# Altium PCB PCB_TestBoard.PcbDoc (part 2 of 2)
Units mil, origin at the board's own origin, x right, y up, seen from the top; angles counter-clockwise.
Board outline 3740.16 x 3346.46 mil, 2 copper layers (Top Layer, Bottom Layer); 100 components, 97 nets, 452 pads, 102 vias.
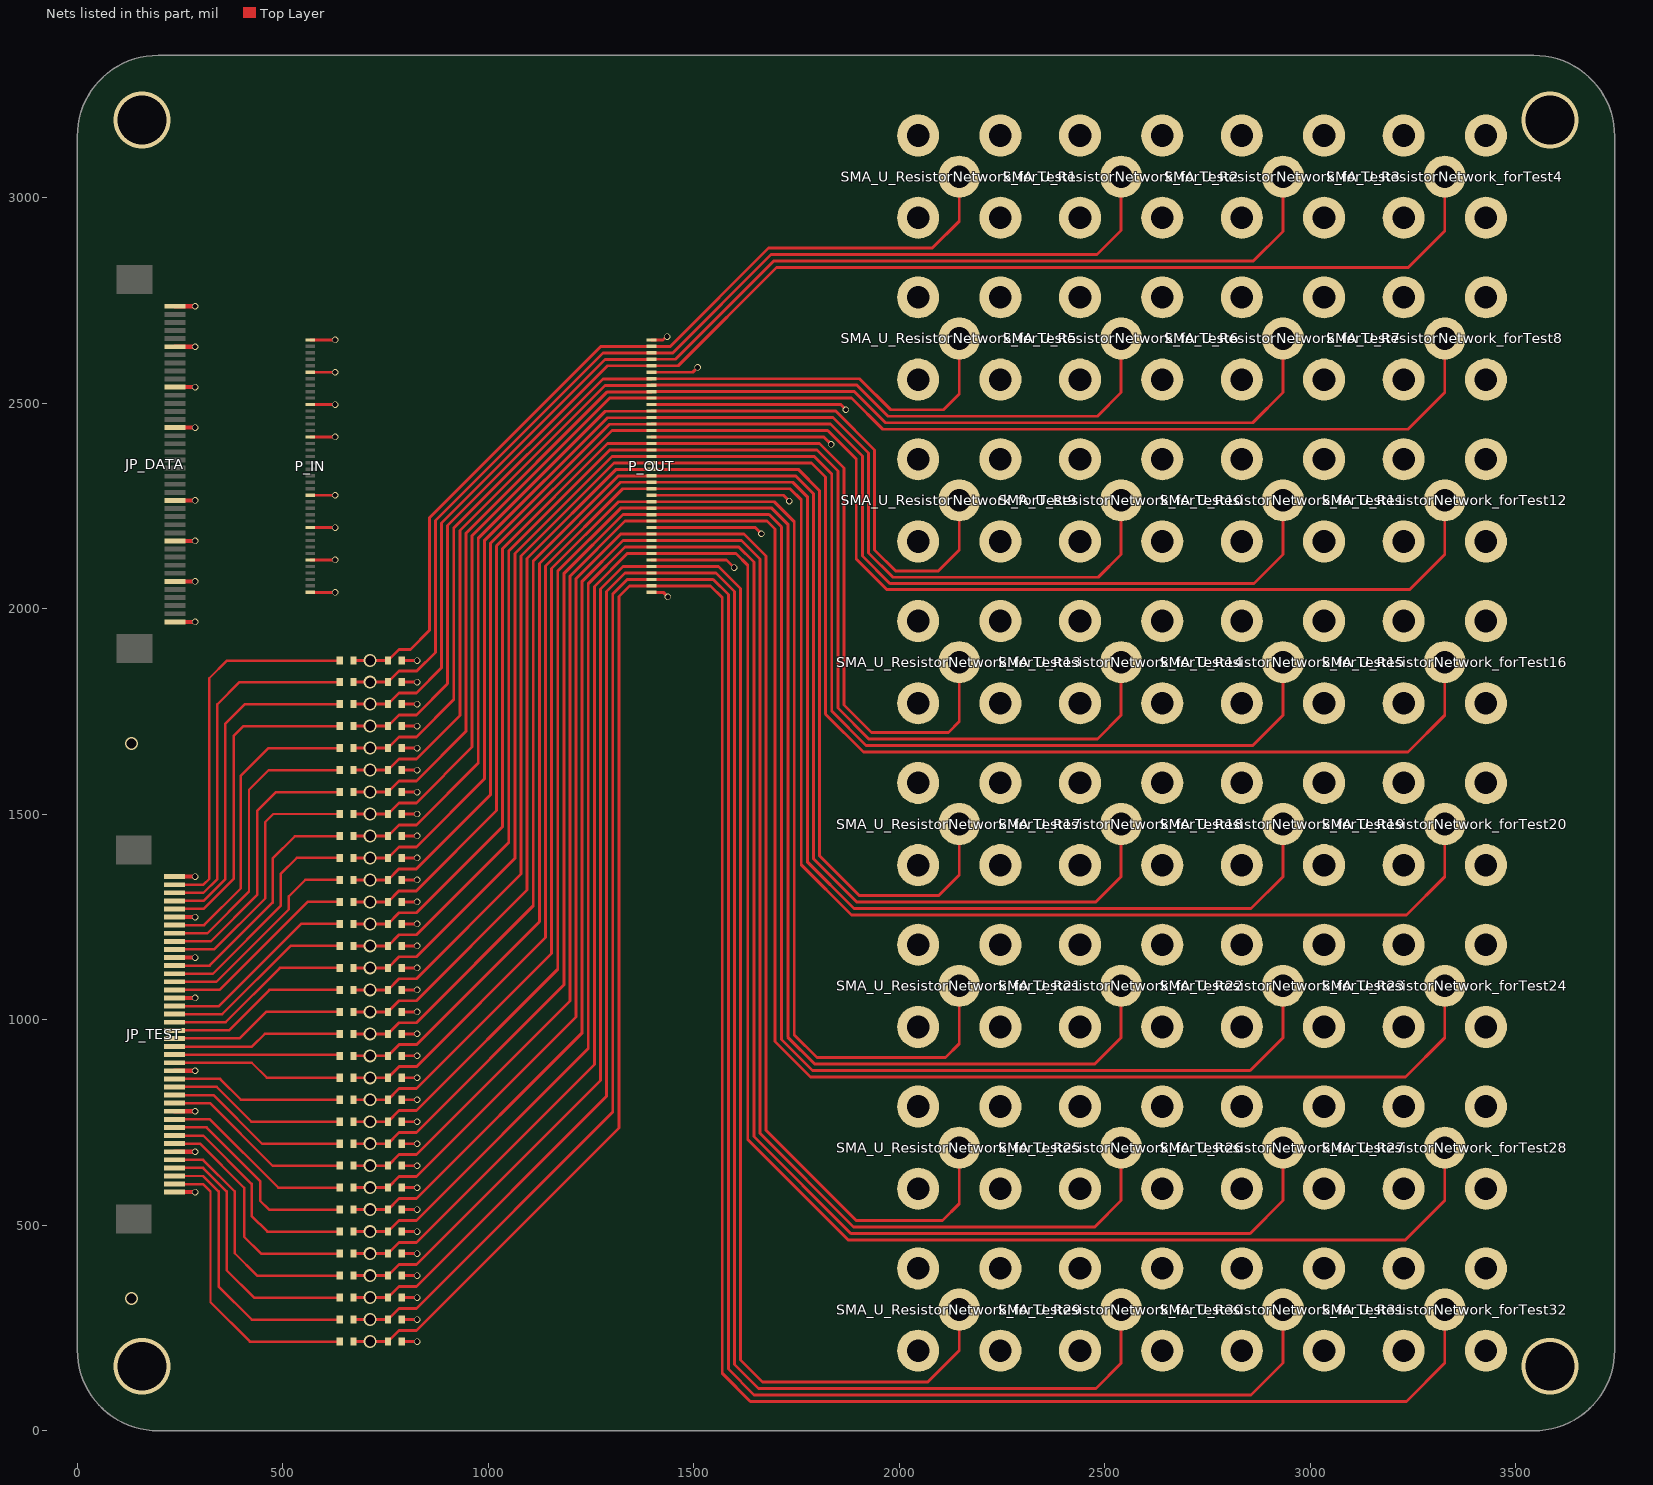
[diagram p2: the nets of this part, all layers, seen from the top]

## Via types
v1: diameter 15.75, hole 11.81, Top Layer to Bottom Layer, tented both sides, 64 vias
v2: diameter 31.5, hole 23.62, Top Layer to Bottom Layer, 34 vias
v3: diameter 137.8, hole 118.11, Top Layer to Bottom Layer, 4 vias

## Nets (pads, with @x,y where several pads share a name; then routed paths per layer and width w, separated by ;. In a path a pad name is that pad's centre, name@x,y a point inside that pad or via, vN(x,y) a via of type N, cw(c..) or ccw(c..) an arc to the next point about the centre after c; other vN are vias at no path point) (continued)
GND: JP_DATA.1 JP_DATA.6 JP_DATA.11 JP_DATA.16 JP_DATA.25 JP_DATA.30 JP_DATA.35 JP_DATA.40 JP_TEST.1 JP_TEST.6 JP_TEST.11 JP_TEST.16 JP_TEST.25 JP_TEST.30 JP_TEST.35 JP_TEST.40 P_IN.1 P_IN.6 P_IN.11 P_IN.16 P_IN.25 P_IN.30 P_IN.35 P_IN.40 P_OUT.1 P_OUT.6 P_OUT.11 P_OUT.16 P_OUT.25 P_OUT.30 P_OUT.35 P_OUT.40 RL_U_ResistorNetwork_forTest1.1 RL_U_ResistorNetwork_forTest2.1 RL_U_ResistorNetwork_forTest3.1 RL_U_ResistorNetwork_forTest4.1 RL_U_ResistorNetwork_forTest5.1 RL_U_ResistorNetwork_forTest6.1 RL_U_ResistorNetwork_forTest7.1 RL_U_ResistorNetwork_forTest8.1 RL_U_ResistorNetwork_forTest9.1 RL_U_ResistorNetwork_forTest10.1 RL_U_ResistorNetwork_forTest11.1 RL_U_ResistorNetwork_forTest12.1 RL_U_ResistorNetwork_forTest13.1 RL_U_ResistorNetwork_forTest14.1 RL_U_ResistorNetwork_forTest15.1 RL_U_ResistorNetwork_forTest16.1 RL_U_ResistorNetwork_forTest17.1 RL_U_ResistorNetwork_forTest18.1 RL_U_ResistorNetwork_forTest19.1 RL_U_ResistorNetwork_forTest20.1 RL_U_ResistorNetwork_forTest21.1 RL_U_ResistorNetwork_forTest22.1 RL_U_ResistorNetwork_forTest23.1 RL_U_ResistorNetwork_forTest24.1 RL_U_ResistorNetwork_forTest25.1 RL_U_ResistorNetwork_forTest26.1 RL_U_ResistorNetwork_forTest27.1 RL_U_ResistorNetwork_forTest28.1 RL_U_ResistorNetwork_forTest29.1 RL_U_ResistorNetwork_forTest30.1 RL_U_ResistorNetwork_forTest31.1 RL_U_ResistorNetwork_forTest32.1 SMA_U_ResistorNetwork_forTest1.2 SMA_U_ResistorNetwork_forTest1.3 SMA_U_ResistorNetwork_forTest2.2 SMA_U_ResistorNetwork_forTest2.3 SMA_U_ResistorNetwork_forTest3.2 SMA_U_ResistorNetwork_forTest3.3 SMA_U_ResistorNetwork_forTest4.2 SMA_U_ResistorNetwork_forTest4.3 SMA_U_ResistorNetwork_forTest5.2 SMA_U_ResistorNetwork_forTest5.3 SMA_U_ResistorNetwork_forTest6.2 SMA_U_ResistorNetwork_forTest6.3 SMA_U_ResistorNetwork_forTest7.2 SMA_U_ResistorNetwork_forTest7.3 SMA_U_ResistorNetwork_forTest8.2 SMA_U_ResistorNetwork_forTest8.3 SMA_U_ResistorNetwork_forTest9.2 SMA_U_ResistorNetwork_forTest9.3 SMA_U_ResistorNetwork_forTest10.2 SMA_U_ResistorNetwork_forTest10.3 SMA_U_ResistorNetwork_forTest11.2 SMA_U_ResistorNetwork_forTest11.3 SMA_U_ResistorNetwork_forTest12.2 SMA_U_ResistorNetwork_forTest12.3 SMA_U_ResistorNetwork_forTest13.2 SMA_U_ResistorNetwork_forTest13.3 SMA_U_ResistorNetwork_forTest14.2 SMA_U_ResistorNetwork_forTest14.3 SMA_U_ResistorNetwork_forTest15.2 SMA_U_ResistorNetwork_forTest15.3 SMA_U_ResistorNetwork_forTest16.2 SMA_U_ResistorNetwork_forTest16.3 SMA_U_ResistorNetwork_forTest17.2 SMA_U_ResistorNetwork_forTest17.3 SMA_U_ResistorNetwork_forTest18.2 SMA_U_ResistorNetwork_forTest18.3 SMA_U_ResistorNetwork_forTest19.2 SMA_U_ResistorNetwork_forTest19.3 SMA_U_ResistorNetwork_forTest20.2 SMA_U_ResistorNetwork_forTest20.3 SMA_U_ResistorNetwork_forTest21.2 SMA_U_ResistorNetwork_forTest21.3 SMA_U_ResistorNetwork_forTest22.2 SMA_U_ResistorNetwork_forTest22.3 SMA_U_ResistorNetwork_forTest23.2 SMA_U_ResistorNetwork_forTest23.3 SMA_U_ResistorNetwork_forTest24.2 SMA_U_ResistorNetwork_forTest24.3 SMA_U_ResistorNetwork_forTest25.2 SMA_U_ResistorNetwork_forTest25.3 SMA_U_ResistorNetwork_forTest26.2 SMA_U_ResistorNetwork_forTest26.3 SMA_U_ResistorNetwork_forTest27.2 SMA_U_ResistorNetwork_forTest27.3 SMA_U_ResistorNetwork_forTest28.2 SMA_U_ResistorNetwork_forTest28.3 SMA_U_ResistorNetwork_forTest29.2 SMA_U_ResistorNetwork_forTest29.3 SMA_U_ResistorNetwork_forTest30.2 SMA_U_ResistorNetwork_forTest30.3 SMA_U_ResistorNetwork_forTest31.2 SMA_U_ResistorNetwork_forTest31.3 SMA_U_ResistorNetwork_forTest32.2 SMA_U_ResistorNetwork_forTest32.3 | length 4418.3
  Top Layer w7: P_IN.40@567.09,2039.96 v1(627.09,2039.96) ; P_IN.35@567.09,2118.7 v1(627.09,2118.7) ; P_IN.30@567.09,2197.44 v1(627.09,2197.44) ; P_IN.25@567.09,2276.18 v1(627.09,2276.18) ; P_IN.16@567.09,2417.91 v1(627.09,2417.91) ; P_IN.11@567.09,2496.65 v1(627.09,2496.65) ; P_IN.6@567.09,2575.39 v1(627.09,2575.39) ; P_IN.1@567.09,2654.13 v1(627.09,2654.13) ; RL_U_ResistorNetwork_forTest32.1@789.37,217.32 v1(826.77,217.32) ; RL_U_ResistorNetwork_forTest31.1@789.37,270.79 v1(826.77,270.79) ; RL_U_ResistorNetwork_forTest30.1@789.37,324.27 v1(826.77,324.27) ; RL_U_ResistorNetwork_forTest29.1@789.37,377.74 v1(826.77,377.74) ; RL_U_ResistorNetwork_forTest28.1@789.37,431.21 v1(826.77,431.21) ; RL_U_ResistorNetwork_forTest27.1@789.37,484.69 v1(826.77,484.69) ; RL_U_ResistorNetwork_forTest26.1@789.37,538.16 v1(826.77,538.16) ; RL_U_ResistorNetwork_forTest25.1@789.37,591.63 v1(826.77,591.63) ; RL_U_ResistorNetwork_forTest24.1@789.37,645.11 v1(826.77,645.11) ; RL_U_ResistorNetwork_forTest23.1@789.37,698.58 v1(826.77,698.58) ; RL_U_ResistorNetwork_forTest22.1@789.37,752.06 v1(826.77,752.06) ; RL_U_ResistorNetwork_forTest21.1@789.37,805.53 v1(826.77,805.53) ; RL_U_ResistorNetwork_forTest20.1@789.37,859 v1(826.77,859) ; RL_U_ResistorNetwork_forTest19.1@789.37,912.48 v1(826.77,912.48) ; RL_U_ResistorNetwork_forTest18.1@789.37,965.95 v1(826.77,965.95) ; RL_U_ResistorNetwork_forTest17.1@789.37,1019.43 v1(826.77,1019.43) ; RL_U_ResistorNetwork_forTest16.1@789.37,1072.9 v1(826.77,1072.9) ; RL_U_ResistorNetwork_forTest15.1@789.37,1126.37 v1(826.77,1126.37) ; RL_U_ResistorNetwork_forTest14.1@789.37,1179.85 v1(826.77,1179.85) ; RL_U_ResistorNetwork_forTest13.1@789.37,1233.32 v1(826.77,1233.32) ; RL_U_ResistorNetwork_forTest12.1@789.37,1286.8 v1(826.77,1286.8) ; RL_U_ResistorNetwork_forTest11.1@789.37,1340.27 v1(826.77,1340.27) ; RL_U_ResistorNetwork_forTest10.1@789.37,1393.74 v1(826.77,1393.74) ; RL_U_ResistorNetwork_forTest9.1@789.37,1447.22 v1(826.77,1447.22) ; RL_U_ResistorNetwork_forTest8.1@789.37,1500.69 v1(826.77,1500.69) ; RL_U_ResistorNetwork_forTest7.1@789.37,1554.16 v1(826.77,1554.16) ; RL_U_ResistorNetwork_forTest6.1@789.37,1607.64 v1(826.77,1607.64) ; RL_U_ResistorNetwork_forTest5.1@789.37,1661.11 v1(826.77,1661.11) ; RL_U_ResistorNetwork_forTest4.1@789.37,1714.59 v1(826.77,1714.59) ; RL_U_ResistorNetwork_forTest3.1@789.37,1768.06 v1(826.77,1768.06) ; RL_U_ResistorNetwork_forTest2.1@789.37,1821.53 v1(826.77,1821.53) ; RL_U_ResistorNetwork_forTest1.1@789.37,1874.02 v1(826.77,1874.02) ; P_OUT.40@1397.09,2039.96 1425.63,2039.96 v1(1436.8,2028.79) ; P_OUT.35@1397.09,2118.7 1579.3,2118.7 v1(1598,2100) ; P_OUT.30@1397.09,2197.44 1649.41,2197.44 v1(1664.45,2182.4) ; P_OUT.25@1397.09,2276.18 1717.82,2276.18 v1(1732,2262) ; P_OUT.16@1397.09,2417.91 1816.09,2417.91 v1(1834,2400) ; P_OUT.11@1397.09,2496.65 1857.35,2496.65 v1(1870,2484) ; P_OUT.6@1397.09,2575.39 1497.39,2575.39 v1(1509,2587) ; P_OUT.1@1397.09,2654.13 1424.77,2654.13 1432.63,2662 v1(1435,2662)
  Top Layer w10: JP_TEST.40@236.1,580.71 v1(286.42,580.71) ; JP_TEST.35@236.1,679.13 v1(286.42,679.13) ; JP_TEST.30@236.1,777.56 v1(286.42,777.56) ; JP_TEST.25@236.1,875.99 v1(286.42,875.99) ; JP_TEST.16@236.1,1053.15 v1(286.42,1053.15) ; JP_TEST.11@236.1,1151.58 v1(286.42,1151.58) ; JP_TEST.6@236.1,1250 v1(286.42,1250) ; JP_TEST.1@236.1,1348.43 v1(286.42,1348.43) ; JP_DATA.40@237.52,1968.19 v1(286.42,1968.19) ; JP_DATA.35@237.52,2066.61 v1(286.42,2066.61) ; JP_DATA.30@237.52,2165.04 v1(286.42,2165.04) ; JP_DATA.25@237.52,2263.47 v1(286.42,2263.47) ; JP_DATA.16@237.52,2440.63 v1(286.42,2440.63) ; JP_DATA.11@237.52,2539.06 v1(286.42,2539.06) ; JP_DATA.6@237.52,2637.48 v1(286.42,2637.48) ; JP_DATA.1@237.52,2735.91 v1(286.42,2735.91)
  other v2: 132.09,322.05 132.09,1672.05
  other v3: 157.48,157.48 3582.68,157.48 157.48,3188.98 3582.68,3188.98
Out1: P_OUT.2 RH_U_ResistorNetwork_forTest1.1 RL_U_ResistorNetwork_forTest1.2 SMA_U_ResistorNetwork_forTest1.1 | length 2185.1
  Top Layer w7: RH_U_ResistorNetwork_forTest1.1@671.97,1874.02 v2(712.6,1874.02) RL_U_ResistorNetwork_forTest1.2@755.91,1874.02 782.94,1901.05 810.39,1901.05 856.39,1947.05 856.39,2220.88 1273.46,2637.95 1396.65,2637.95 P_OUT.2@1397.09,2638.39 1442.42,2638.39 1681.33,2877.29 2080.09,2877.29 2145.67,2942.87 SMA_U_ResistorNetwork_forTest1.1@2145.67,3051.18
Out2: P_OUT.3 RH_U_ResistorNetwork_forTest2.1 RL_U_ResistorNetwork_forTest2.2 SMA_U_ResistorNetwork_forTest2.1 | length 2641.3
  Top Layer w7: RH_U_ResistorNetwork_forTest2.1@671.97,1821.53 v2(712.6,1821.53) RL_U_ResistorNetwork_forTest2.2@755.91,1821.53 782.94,1848.57 825.89,1848.57 871.27,1893.94 871.27,2214.72 1278.75,2622.2 1396.65,2622.2 P_OUT.3@1397.09,2622.64 1448.95,2622.64 1687.85,2861.54 2480.58,2861.54 2539.37,2920.33 SMA_U_ResistorNetwork_forTest2.1@2539.37,3051.18
Out3: P_OUT.4 RH_U_ResistorNetwork_forTest3.1 RL_U_ResistorNetwork_forTest3.2 SMA_U_ResistorNetwork_forTest3.1 | length 3076.9
  Top Layer w7: RH_U_ResistorNetwork_forTest3.1@671.97,1768.06 v2(712.6,1768.06) RL_U_ResistorNetwork_forTest3.2@755.91,1768.06 782.94,1795.09 824.9,1795.09 886.14,1856.33 886.14,2208.56 1284.04,2606.45 1396.65,2606.45 P_OUT.4@1397.09,2606.89 1455.47,2606.89 1694.38,2845.8 2860.83,2845.8 2933.07,2918.03 SMA_U_ResistorNetwork_forTest3.1@2933.07,3051.18
Out4: P_OUT.5 RH_U_ResistorNetwork_forTest4.1 RL_U_ResistorNetwork_forTest4.2 SMA_U_ResistorNetwork_forTest4.1 | length 3511.4
  Top Layer w7: RH_U_ResistorNetwork_forTest4.1@671.97,1714.59 v2(712.6,1714.59) RL_U_ResistorNetwork_forTest4.2@755.91,1714.59 782.94,1741.62 824.9,1741.62 901.02,1817.73 901.02,2202.39 1289.76,2591.14 P_OUT.5@1397.09,2591.14 1461.99,2591.14 1700.9,2830.05 3238.09,2830.05 3326.77,2918.73 SMA_U_ResistorNetwork_forTest4.1@3326.77,3051.18
Out5: P_OUT.7 RH_U_ResistorNetwork_forTest5.1 RL_U_ResistorNetwork_forTest5.2 SMA_U_ResistorNetwork_forTest5.1 | length 2272.4
  Top Layer w7: RH_U_ResistorNetwork_forTest5.1@671.97,1661.11 v2(712.6,1661.11) RL_U_ResistorNetwork_forTest5.2@755.91,1661.11 782.94,1688.14 824.9,1688.14 915.89,1779.13 915.89,2196.23 1278.86,2559.21 1396.65,2559.21 P_OUT.7@1397.09,2559.65 1903.3,2559.65 1978.9,2484.05 2107.09,2484.05 2145.67,2522.63 SMA_U_ResistorNetwork_forTest5.1@2145.67,2657.48
Out6: P_OUT.8 RH_U_ResistorNetwork_forTest6.1 RL_U_ResistorNetwork_forTest6.2 SMA_U_ResistorNetwork_forTest6.1 | length 2705.2
  Top Layer w7: RH_U_ResistorNetwork_forTest6.1@671.97,1607.64 v2(712.6,1607.64) RL_U_ResistorNetwork_forTest6.2@755.91,1607.64 782.94,1634.67 824.9,1634.67 930.76,1740.53 930.76,2190.07 1284.15,2543.46 1396.65,2543.46 1397.09,2543.9 1896.78,2543.9 1972.38,2468.3 2481.64,2468.3 2539.37,2526.03 SMA_U_ResistorNetwork_forTest6.1@2539.37,2657.48
Out7: P_OUT.9 RH_U_ResistorNetwork_forTest7.1 RL_U_ResistorNetwork_forTest7.2 SMA_U_ResistorNetwork_forTest7.1 | length 3140.1
  Top Layer w7: RH_U_ResistorNetwork_forTest7.1@671.97,1554.16 v2(712.6,1554.16) RL_U_ResistorNetwork_forTest7.2@755.91,1554.16 782.94,1581.2 824.9,1581.2 945.64,1701.93 945.64,2183.91 1289.44,2527.71 1396.65,2527.71 P_OUT.9@1397.09,2528.15 1890.26,2528.15 1965.85,2452.55 2859.59,2452.55 2933.07,2526.03 SMA_U_ResistorNetwork_forTest7.1@2933.07,2657.48
Out8: P_OUT.10 RH_U_ResistorNetwork_forTest8.1 RL_U_ResistorNetwork_forTest8.2 SMA_U_ResistorNetwork_forTest8.1 | length 3574.9
  Top Layer w7: RH_U_ResistorNetwork_forTest8.1@671.97,1500.69 v2(712.6,1500.69) RL_U_ResistorNetwork_forTest8.2@755.91,1500.69 782.94,1527.72 824.9,1527.72 960.51,1663.33 960.51,2177.75 1295.16,2512.4 P_OUT.10@1397.09,2512.4 1883.73,2512.4 1959.33,2436.8 3237.54,2436.8 3326.77,2526.03 SMA_U_ResistorNetwork_forTest8.1@3326.77,2657.48
Out9: P_OUT.12 RH_U_ResistorNetwork_forTest9.1 RL_U_ResistorNetwork_forTest9.2 SMA_U_ResistorNetwork_forTest9.1 | length 2668
  Top Layer w7: RH_U_ResistorNetwork_forTest9.1@671.97,1447.22 v2(712.6,1447.22) RL_U_ResistorNetwork_forTest9.2@755.91,1447.22 782.94,1474.25 824.9,1474.25 975.39,1624.74 975.39,2171.59 1284.26,2480.47 1396.65,2480.47 P_OUT.12@1397.09,2480.91 1845.09,2480.91 1939.71,2386.29 1939.71,2143.24 1991.49,2091.45 2094.09,2091.45 2145.67,2143.04 SMA_U_ResistorNetwork_forTest9.1@2145.67,2263.78
Out10: P_OUT.13 RH_U_ResistorNetwork_forTest10.1 RL_U_ResistorNetwork_forTest10.2 SMA_U_ResistorNetwork_forTest10.1 | length 3108.6
  Top Layer w7: RH_U_ResistorNetwork_forTest10.1@671.97,1393.74 v2(712.6,1393.74) RL_U_ResistorNetwork_forTest10.2@755.91,1393.74 782.94,1420.78 824.9,1420.78 990.26,1586.14 990.26,2165.43 1289.55,2464.72 1396.65,2464.72 P_OUT.13@1397.09,2465.16 1838.57,2465.16 1924.83,2378.89 1924.83,2135.84 1984.1,2076.58 2483.92,2076.58 2539.37,2132.03 SMA_U_ResistorNetwork_forTest10.1@2539.37,2263.78
Out11: P_OUT.14 RH_U_ResistorNetwork_forTest11.1 RL_U_ResistorNetwork_forTest11.2 SMA_U_ResistorNetwork_forTest11.1 | length 3542.7
  Top Layer w7: RH_U_ResistorNetwork_forTest11.1@671.97,1340.27 v2(712.6,1340.27) RL_U_ResistorNetwork_forTest11.2@755.91,1340.27 782.94,1367.3 824.9,1367.3 1005.13,1547.54 1005.13,2159.27 1294.84,2448.97 1396.65,2448.97 P_OUT.14@1397.09,2449.41 1832.05,2449.41 1909.96,2371.5 1909.96,2128.44 1976.7,2061.71 2862.75,2061.71 2933.07,2132.03 SMA_U_ResistorNetwork_forTest11.1@2933.07,2263.78
Out12: P_OUT.15 RH_U_ResistorNetwork_forTest12.1 RL_U_ResistorNetwork_forTest12.2 SMA_U_ResistorNetwork_forTest12.1 | length 3976.8
  Top Layer w7: RH_U_ResistorNetwork_forTest12.1@671.97,1286.8 v2(712.6,1286.8) RL_U_ResistorNetwork_forTest12.2@755.91,1286.8 782.94,1313.83 824.9,1313.83 1020.01,1508.94 1020.01,2153.11 1300.56,2433.66 P_OUT.15@1397.09,2433.66 1825.53,2433.66 1895.09,2364.1 1895.09,2121.05 1969.3,2046.83 3241.57,2046.83 3326.77,2132.03 SMA_U_ResistorNetwork_forTest12.1@3326.77,2263.78
Out13: P_OUT.17 RH_U_ResistorNetwork_forTest13.1 RL_U_ResistorNetwork_forTest13.2 SMA_U_ResistorNetwork_forTest13.1 | length 3138.9
  Top Layer w7: RH_U_ResistorNetwork_forTest13.1@671.97,1233.32 v2(712.6,1233.32) RL_U_ResistorNetwork_forTest13.2@755.91,1233.32 782.94,1260.35 824.9,1260.35 1034.88,1470.34 1034.88,2146.95 1290.1,2402.17 P_OUT.17@1397.09,2402.17 1805.83,2402.17 1865.2,2342.8 1865.2,1765.74 1931.9,1699.05 2119.09,1699.05 2145.67,1725.63 SMA_U_ResistorNetwork_forTest13.1@2145.67,1870.08
Out14: P_OUT.18 RH_U_ResistorNetwork_forTest14.1 RL_U_ResistorNetwork_forTest14.2 SMA_U_ResistorNetwork_forTest14.1 | length 3564.8
  Top Layer w7: RH_U_ResistorNetwork_forTest14.1@671.97,1179.85 v2(712.6,1179.85) RL_U_ResistorNetwork_forTest14.2@755.91,1179.85 782.94,1206.88 824.9,1206.88 1049.76,1431.74 1049.76,2140.78 1295.39,2386.42 P_OUT.18@1397.09,2386.42 1799.31,2386.42 1850.33,2335.4 1850.33,1758.35 1925.38,1683.3 2481.64,1683.3 2539.37,1741.03 SMA_U_ResistorNetwork_forTest14.1@2539.37,1870.08
Out15: P_OUT.19 RH_U_ResistorNetwork_forTest15.1 RL_U_ResistorNetwork_forTest15.2 SMA_U_ResistorNetwork_forTest15.1 | length 3999.6
  Top Layer w7: RH_U_ResistorNetwork_forTest15.1@671.97,1126.37 v2(712.6,1126.37) RL_U_ResistorNetwork_forTest15.2@755.91,1126.37 782.94,1153.41 824.9,1153.41 1064.63,1393.14 1064.63,2134.62 1300.68,2370.67 P_OUT.19@1397.09,2370.67 1792.79,2370.67 1835.46,2328 1835.46,1750.95 1918.85,1667.55 2859.59,1667.55 2933.07,1741.03 SMA_U_ResistorNetwork_forTest15.1@2933.07,1870.08
Out16: P_OUT.20 RH_U_ResistorNetwork_forTest16.1 RL_U_ResistorNetwork_forTest16.2 SMA_U_ResistorNetwork_forTest16.1 | length 4434.5
  Top Layer w7: RH_U_ResistorNetwork_forTest16.1@671.97,1072.9 v2(712.6,1072.9) RL_U_ResistorNetwork_forTest16.2@755.91,1072.9 782.94,1099.93 824.9,1099.93 1079.5,1354.54 1079.5,2128.46 1305.96,2354.92 P_OUT.20@1397.09,2354.92 1786.27,2354.92 1820.58,2320.6 1820.58,1743.55 1912.33,1651.8 3237.54,1651.8 3326.77,1741.03 SMA_U_ResistorNetwork_forTest16.1@3326.77,1870.08
Out17: P_OUT.21 RH_U_ResistorNetwork_forTest17.1 RL_U_ResistorNetwork_forTest17.2 SMA_U_ResistorNetwork_forTest17.1 | length 3587.2
  Top Layer w7: RH_U_ResistorNetwork_forTest17.1@671.97,1019.43 683.34,1019.43 v2(712.6,1019.43) 744.53,1019.43 RL_U_ResistorNetwork_forTest17.2@755.91,1019.43 782.94,1046.46 824.9,1046.46 1094.38,1315.94 1094.38,2122.3 1311.25,2339.17 P_OUT.21@1397.09,2339.17 1753.77,2339.17 1805.71,2287.24 1805.71,1399.24 1902.9,1302.05 2095.09,1302.05 2145.67,1352.63 SMA_U_ResistorNetwork_forTest17.1@2145.67,1476.38
Out18: P_OUT.22 RH_U_ResistorNetwork_forTest18.1 RL_U_ResistorNetwork_forTest18.2 SMA_U_ResistorNetwork_forTest18.1 | length 4024.7
  Top Layer w7: RH_U_ResistorNetwork_forTest18.1@671.97,965.95 683.34,965.95 v2(712.6,965.95) 744.53,965.95 RL_U_ResistorNetwork_forTest18.2@755.91,965.95 782.94,992.98 824.9,992.98 1109.25,1277.34 1109.25,2116.14 1316.54,2323.43 P_OUT.22@1397.09,2323.43 1747.25,2323.43 1790.83,2279.84 1790.83,1391.84 1896.38,1286.3 2477.64,1286.3 2539.37,1348.03 SMA_U_ResistorNetwork_forTest18.1@2539.37,1476.38
Out19: P_OUT.23 RH_U_ResistorNetwork_forTest19.1 RL_U_ResistorNetwork_forTest19.2 SMA_U_ResistorNetwork_forTest19.1 | length 4459.6
  Top Layer w7: RH_U_ResistorNetwork_forTest19.1@671.97,912.48 683.34,912.48 v2(712.6,912.48) 744.53,912.48 RL_U_ResistorNetwork_forTest19.2@755.91,912.48 782.94,939.51 824.9,939.51 1124.13,1238.74 1124.13,2109.98 1321.82,2307.68 P_OUT.23@1397.09,2307.68 1740.73,2307.68 1775.96,2272.44 1775.96,1384.44 1889.85,1270.55 2855.59,1270.55 2933.07,1348.03 SMA_U_ResistorNetwork_forTest19.1@2933.07,1476.38
Out20: P_OUT.24 RH_U_ResistorNetwork_forTest20.1 RL_U_ResistorNetwork_forTest20.2 SMA_U_ResistorNetwork_forTest20.1 | length 4894.4
  Top Layer w7: RH_U_ResistorNetwork_forTest20.1@671.97,859 683.34,859 v2(712.6,859) 744.53,859 RL_U_ResistorNetwork_forTest20.2@755.91,859 782.94,886.04 824.9,886.04 1139,1200.14 1139,2103.82 1327.11,2291.93 P_OUT.24@1397.09,2291.93 1734.2,2291.93 1761.09,2265.05 1761.09,1377.05 1883.33,1254.8 3233.54,1254.8 3326.77,1348.03 SMA_U_ResistorNetwork_forTest20.1@3326.77,1476.38
Out21: P_OUT.26 RH_U_ResistorNetwork_forTest21.1 RL_U_ResistorNetwork_forTest21.2 SMA_U_ResistorNetwork_forTest21.1 | length 4071.3
  Top Layer w7: RH_U_ResistorNetwork_forTest21.1@671.97,805.53 683.34,805.53 v2(712.6,805.53) 744.53,805.53 RL_U_ResistorNetwork_forTest21.2@755.91,805.53 782.94,832.56 824.9,832.56 1153.87,1161.54 1153.87,2097.66 1316.65,2260.43 P_OUT.26@1397.09,2260.43 1695.7,2260.43 1744.33,2211.8 1744.33,963.05 1799.33,908.05 2112.09,908.05 2145.67,941.63 SMA_U_ResistorNetwork_forTest21.1@2145.67,1082.68
Out22: P_OUT.27 RH_U_ResistorNetwork_forTest22.1 RL_U_ResistorNetwork_forTest22.2 SMA_U_ResistorNetwork_forTest22.1 | length 4497
  Top Layer w7: RH_U_ResistorNetwork_forTest22.1@671.97,752.06 683.34,752.06 v2(712.6,752.06) 744.53,752.06 RL_U_ResistorNetwork_forTest22.2@755.91,752.06 782.94,779.09 824.9,779.09 1168.75,1122.94 1168.75,2091.5 1321.94,2244.69 P_OUT.27@1397.09,2244.68 1689.45,2244.69 1728.58,2205.55 1728.58,957.76 1794.04,892.3 2475.34,892.3 2539.37,956.33 SMA_U_ResistorNetwork_forTest22.1@2539.37,1082.68
Out23: P_OUT.28 RH_U_ResistorNetwork_forTest23.1 RL_U_ResistorNetwork_forTest23.2 SMA_U_ResistorNetwork_forTest23.1 | length 4931.3
  Top Layer w7: RH_U_ResistorNetwork_forTest23.1@671.97,698.58 683.34,698.58 v2(712.6,698.58) 744.53,698.58 RL_U_ResistorNetwork_forTest23.2@755.91,698.58 782.94,725.61 824.9,725.61 1183.62,1084.34 1183.62,2085.34 1327.22,2228.94 P_OUT.28@1397.09,2228.94 1683.2,2228.94 1712.83,2199.3 1712.83,952.47 1788.76,876.55 2853.29,876.55 2933.07,956.33 SMA_U_ResistorNetwork_forTest23.1@2933.07,1082.68
Out24: P_OUT.29 RH_U_ResistorNetwork_forTest24.1 RL_U_ResistorNetwork_forTest24.2 SMA_U_ResistorNetwork_forTest24.1 | length 5366.2
  Top Layer w7: RH_U_ResistorNetwork_forTest24.1@671.97,645.11 683.34,645.11 v2(712.6,645.11) 744.53,645.11 RL_U_ResistorNetwork_forTest24.2@755.91,645.11 782.94,672.14 824.9,672.14 1198.5,1045.74 1198.5,2079.17 1332.51,2213.19 1677.91,2213.19 1697.09,2194.01 1697.09,947.19 1783.47,860.8 3231.24,860.8 3326.77,956.33 SMA_U_ResistorNetwork_forTest24.1@3326.77,1082.68
Out25: P_OUT.31 RH_U_ResistorNetwork_forTest25.1 RL_U_ResistorNetwork_forTest25.2 SMA_U_ResistorNetwork_forTest25.1 | length 4419.8
  Top Layer w7: RH_U_ResistorNetwork_forTest25.1@671.97,591.63 683.34,591.63 v2(712.6,591.63) 744.53,591.63 RL_U_ResistorNetwork_forTest25.2@755.91,591.63 782.94,618.67 824.9,618.67 1213.37,1007.14 1213.37,2073.01 1322.05,2181.69 P_OUT.31@1397.09,2181.69 1622.25,2181.69 1675.71,2128.24 1675.71,731.24 1894.9,512.05 2105.09,512.05 2145.67,552.63 SMA_U_ResistorNetwork_forTest25.1@2145.67,688.98
Out26: P_OUT.32 RH_U_ResistorNetwork_forTest26.1 RL_U_ResistorNetwork_forTest26.2 SMA_U_ResistorNetwork_forTest26.1 | length 4850.1
  Top Layer w7: RH_U_ResistorNetwork_forTest26.1@671.97,538.16 683.34,538.16 v2(712.6,538.16) 744.53,538.16 RL_U_ResistorNetwork_forTest26.2@755.91,538.16 782.94,565.19 824.9,565.19 1228.24,968.54 1228.24,2066.85 1327.34,2165.95 P_OUT.32@1397.09,2165.94 1615.73,2165.95 1660.83,2120.84 1660.83,723.84 1888.38,496.3 2475.34,496.3 2539.37,560.33 SMA_U_ResistorNetwork_forTest26.1@2539.37,688.98
Out27: P_OUT.33 RH_U_ResistorNetwork_forTest27.1 RL_U_ResistorNetwork_forTest27.2 SMA_U_ResistorNetwork_forTest27.1 | length 5285
  Top Layer w7: RH_U_ResistorNetwork_forTest27.1@671.97,484.69 683.34,484.69 v2(712.6,484.69) 744.53,484.69 RL_U_ResistorNetwork_forTest27.2@755.91,484.69 782.94,511.72 824.9,511.72 1243.12,929.94 1243.12,2060.69 1332.62,2150.2 1397.09,2150.2 1609.21,2150.2 1645.96,2113.44 1645.96,716.44 1881.85,480.55 2853.29,480.55 2933.07,560.33 SMA_U_ResistorNetwork_forTest27.1@2933.07,688.98
Out28: P_OUT.34 RH_U_ResistorNetwork_forTest28.1 RL_U_ResistorNetwork_forTest28.2 SMA_U_ResistorNetwork_forTest28.1 | length 5719.8
  Top Layer w7: RH_U_ResistorNetwork_forTest28.1@671.97,431.21 683.34,431.21 v2(712.6,431.21) 744.53,431.21 RL_U_ResistorNetwork_forTest28.2@755.91,431.21 782.94,458.25 824.9,458.25 1257.99,891.34 1257.99,2054.53 1337.91,2134.45 P_OUT.34@1397.09,2134.45 1602.68,2134.45 1631.09,2106.05 1631.09,709.05 1875.33,464.8 3231.24,464.8 3326.77,560.33 SMA_U_ResistorNetwork_forTest28.1@3326.77,688.98
Out29: P_OUT.36 RH_U_ResistorNetwork_forTest29.1 RL_U_ResistorNetwork_forTest29.2 SMA_U_ResistorNetwork_forTest29.1 | length 4941.2
  Top Layer w7: RH_U_ResistorNetwork_forTest29.1@671.97,377.74 683.34,377.74 v2(712.6,377.74) RL_U_ResistorNetwork_forTest29.2@755.91,377.74 782.94,404.77 824.9,404.77 1272.87,852.74 1272.87,2048.37 1327.45,2102.95 P_OUT.36@1397.09,2102.95 1559.99,2102.95 1613.71,2049.24 1613.71,172.45 1667.12,119.05 2069.09,119.05 2145.67,195.63 SMA_U_ResistorNetwork_forTest29.1@2145.67,295.28
Out30: P_OUT.37 RH_U_ResistorNetwork_forTest30.1 RL_U_ResistorNetwork_forTest30.2 SMA_U_ResistorNetwork_forTest30.1 | length 5396.6
  Top Layer w7: RH_U_ResistorNetwork_forTest30.1@671.97,324.27 683.34,324.27 v2(712.6,324.27) RL_U_ResistorNetwork_forTest30.2@755.91,324.27 782.94,351.3 824.9,351.3 1287.74,814.14 1287.74,2042.21 1332.74,2087.21 P_OUT.37@1397.09,2087.2 1553.47,2087.21 1598.83,2041.84 1598.83,161.32 1656.85,103.3 2478.34,103.3 2539.37,164.33 SMA_U_ResistorNetwork_forTest30.1@2539.37,295.28
Out31: P_OUT.38 RH_U_ResistorNetwork_forTest31.1 RL_U_ResistorNetwork_forTest31.2 SMA_U_ResistorNetwork_forTest31.1 | length 5833.2
  Top Layer w7: RH_U_ResistorNetwork_forTest31.1@671.97,270.79 683.34,270.79 v2(712.6,270.79) 744.53,270.79 RL_U_ResistorNetwork_forTest31.2@755.91,270.79 782.94,297.82 824.9,297.82 1302.61,775.54 1302.61,2036.05 1338.02,2071.46 P_OUT.38@1397.09,2071.46 1546.95,2071.46 1583.96,2034.44 1583.96,150.18 1646.59,87.55 2855.59,87.55 2933.07,165.03 SMA_U_ResistorNetwork_forTest31.1@2933.07,295.28
Out32: P_OUT.39 RH_U_ResistorNetwork_forTest32.1 RL_U_ResistorNetwork_forTest32.2 SMA_U_ResistorNetwork_forTest32.1 | length 6269.7
  Top Layer w7: RH_U_ResistorNetwork_forTest32.1@671.97,217.32 683.34,217.32 v2(712.6,217.32) 744.53,217.32 RL_U_ResistorNetwork_forTest32.2@755.91,217.32 782.94,244.35 824.9,244.35 1317.49,736.94 1317.49,2029.89 1343.31,2055.71 P_OUT.39@1397.09,2055.71 1540.42,2055.71 1569.09,2027.05 1569.09,140.05 1637.33,71.8 3233.54,71.8 3326.77,165.03 SMA_U_ResistorNetwork_forTest32.1@3326.77,295.28
TestIn1: JP_TEST.2 RH_U_ResistorNetwork_forTest1.2 | length 914.3
  Top Layer w6: JP_TEST.2@236.1,1328.74 307.09,1328.74 321.09,1342.74 321.09,1831.05 364.05,1874.02 RH_U_ResistorNetwork_forTest1.2@638.5,1874.02
TestIn2: JP_TEST.3 RH_U_ResistorNetwork_forTest2.2 | length 863.6
  Top Layer w6: JP_TEST.3@236.1,1309.06 307.09,1309.06 340.77,1342.74 340.77,1767.73 394.57,1821.53 RH_U_ResistorNetwork_forTest2.2@638.5,1821.53
TestIn3: JP_TEST.4 RH_U_ResistorNetwork_forTest3.2 | length 821.9
  Top Layer w6: JP_TEST.4@236.1,1289.37 307.09,1289.37 360.46,1342.74 360.46,1720.42 408.1,1768.06 RH_U_ResistorNetwork_forTest3.2@638.5,1768.06
TestIn4: JP_TEST.5 RH_U_ResistorNetwork_forTest4.2 | length 790.1
  Top Layer w6: JP_TEST.5@236.1,1269.69 307.09,1269.69 380.14,1342.74 380.14,1690.05 404.68,1714.59 RH_U_ResistorNetwork_forTest4.2@638.5,1714.59
TestIn5: JP_TEST.7 RH_U_ResistorNetwork_forTest5.2 | length 741.3
  Top Layer w6: JP_TEST.7@236.1,1230.32 308.35,1230.32 398.09,1320.05 398.09,1594.05 465.15,1661.11 RH_U_ResistorNetwork_forTest5.2@638.5,1661.11
TestIn6: JP_TEST.8 RH_U_ResistorNetwork_forTest6.2 | length 712
  Top Layer w6: JP_TEST.8@236.1,1210.63 316.51,1210.63 417.77,1311.89 417.77,1559.73 465.68,1607.64 RH_U_ResistorNetwork_forTest6.2@638.5,1607.64
TestIn7: JP_TEST.9 RH_U_ResistorNetwork_forTest7.2 | length 672.7
  Top Layer w6: JP_TEST.9@236.1,1190.95 324.66,1190.95 437.46,1303.74 437.46,1508.42 483.2,1554.16 RH_U_ResistorNetwork_forTest7.2@638.5,1554.16
TestIn8: JP_TEST.10 RH_U_ResistorNetwork_forTest8.2 | length 647.5
  Top Layer w6: JP_TEST.10@236.1,1171.26 332.82,1171.26 457.14,1295.59 457.14,1481.05 476.79,1500.69 RH_U_ResistorNetwork_forTest8.2@638.5,1500.69
TestIn9: JP_TEST.12 RH_U_ResistorNetwork_forTest9.2 | length 595.7
  Top Layer w6: JP_TEST.12@236.1,1131.89 321.93,1131.89 475.09,1285.05 475.09,1392.05 529.09,1446.05 637.33,1446.05 RH_U_ResistorNetwork_forTest9.2@638.5,1447.22
TestIn10: JP_TEST.13 RH_U_ResistorNetwork_forTest10.2 | length 564.6
  Top Layer w6: JP_TEST.13@236.1,1112.21 330.08,1112.21 494.77,1276.89 494.77,1354.73 533.78,1393.74 RH_U_ResistorNetwork_forTest10.2@638.5,1393.74
TestIn11: JP_TEST.14 RH_U_ResistorNetwork_forTest11.2 | length 523.4
  Top Layer w6: JP_TEST.14@236.1,1092.52 338.24,1092.52 514.46,1268.74 514.46,1300.05 554.68,1340.27 RH_U_ResistorNetwork_forTest11.2@638.5,1340.27
TestIn12: JP_TEST.15 RH_U_ResistorNetwork_forTest12.2 | length 491
  Top Layer w6: JP_TEST.15@236.1,1072.84 346.39,1072.84 560.35,1286.8 RH_U_ResistorNetwork_forTest12.2@638.5,1286.8
TestIn13: JP_TEST.17 RH_U_ResistorNetwork_forTest13.2 | length 485.2
  Top Layer w6: JP_TEST.17@236.1,1033.47 344.5,1033.47 544.36,1233.32 RH_U_ResistorNetwork_forTest13.2@638.5,1233.32
TestIn14: JP_TEST.18 RH_U_ResistorNetwork_forTest14.2 | length 471.2
  Top Layer w6: JP_TEST.18@236.1,1013.78 352.66,1013.78 518.73,1179.85 RH_U_ResistorNetwork_forTest14.2@638.5,1179.85
TestIn15: JP_TEST.19 RH_U_ResistorNetwork_forTest15.2 | length 457.2
  Top Layer w6: JP_TEST.19@236.1,994.1 360.81,994.1 493.09,1126.37 RH_U_ResistorNetwork_forTest15.2@638.5,1126.37
TestIn16: JP_TEST.20 RH_U_ResistorNetwork_forTest16.2 | length 443.2
  Top Layer w6: JP_TEST.20@236.1,974.41 368.97,974.41 467.46,1072.9 RH_U_ResistorNetwork_forTest16.2@638.5,1072.9
TestIn17: JP_TEST.21 RH_U_ResistorNetwork_forTest17.2 | length 429.2
  Top Layer w6: JP_TEST.21@236.1,954.73 394.76,954.73 459.46,1019.43 RH_U_ResistorNetwork_forTest17.2@638.5,1019.43
TestIn18: JP_TEST.22 RH_U_ResistorNetwork_forTest18.2 | length 415.2
  Top Layer w6: JP_TEST.22@236.1,935.04 425.08,935.04 455.99,965.95 RH_U_ResistorNetwork_forTest18.2@638.5,965.95
TestIn19: JP_TEST.23 RH_U_ResistorNetwork_forTest19.2 | length 403.6
  Top Layer w6: JP_TEST.23@236.1,915.36 635.63,915.36 RH_U_ResistorNetwork_forTest19.2@638.5,912.48
TestIn20: JP_TEST.24 RH_U_ResistorNetwork_forTest20.2 | length 417.6
  Top Layer w6: JP_TEST.24@236.1,895.67 424.46,895.67 461.13,859 RH_U_ResistorNetwork_forTest20.2@638.5,859
TestIn21: JP_TEST.26 RH_U_ResistorNetwork_forTest21.2 | length 423.4
  Top Layer w6: JP_TEST.26@236.1,856.3 347.35,856.3 398.12,805.53 RH_U_ResistorNetwork_forTest21.2@638.5,805.53
TestIn22: JP_TEST.27 RH_U_ResistorNetwork_forTest22.2 | length 437.4
  Top Layer w6: JP_TEST.27@236.1,836.61 339.2,836.61 423.76,752.06 RH_U_ResistorNetwork_forTest22.2@638.5,752.06
TestIn23: JP_TEST.28 RH_U_ResistorNetwork_forTest23.2 | length 451.4
  Top Layer w6: JP_TEST.28@236.1,816.93 331.04,816.93 449.39,698.58 RH_U_ResistorNetwork_forTest23.2@638.5,698.58
TestIn24: JP_TEST.29 RH_U_ResistorNetwork_forTest24.2 | length 465.4
  Top Layer w6: JP_TEST.29@236.1,797.24 322.89,797.24 475.03,645.11 RH_U_ResistorNetwork_forTest24.2@638.5,645.11
TestIn25: JP_TEST.31 RH_U_ResistorNetwork_forTest25.2 | length 471.3
  Top Layer w6: JP_TEST.31@236.1,757.87 322.78,757.87 489.02,591.63 RH_U_ResistorNetwork_forTest25.2@638.5,591.63
TestIn26: JP_TEST.32 RH_U_ResistorNetwork_forTest26.2 | length 513.5
  Top Layer w6: JP_TEST.32@236.1,738.19 314.62,738.19 444.92,607.89 444.92,559.73 466.5,538.16 RH_U_ResistorNetwork_forTest26.2@638.5,538.16
TestIn27: JP_TEST.33 RH_U_ResistorNetwork_forTest27.2 | length 544.8
  Top Layer w6: JP_TEST.33@236.1,718.5 306.47,718.5 424.09,600.89 424.09,523.05 462.45,484.69 RH_U_ResistorNetwork_forTest27.2@638.5,484.69
TestIn28: JP_TEST.34 RH_U_ResistorNetwork_forTest28.2 | length 583
  Top Layer w6: JP_TEST.34@236.1,698.82 298.31,698.82 406.09,591.05 406.09,472.05 446.92,431.21 RH_U_ResistorNetwork_forTest28.2@638.5,431.21
TestIn29: JP_TEST.36 RH_U_ResistorNetwork_forTest29.2 | length 607.2
  Top Layer w6: JP_TEST.36@236.1,659.45 306.09,659.45 383.14,582.39 383.14,432.05 437.45,377.74 RH_U_ResistorNetwork_forTest29.2@638.5,377.74
TestIn30: JP_TEST.37 RH_U_ResistorNetwork_forTest30.2 | length 645.4
  Top Layer w6: JP_TEST.37@236.1,639.76 306.09,639.76 363.46,582.39 363.46,390.68 429.87,324.27 RH_U_ResistorNetwork_forTest30.2@638.5,324.27
TestIn31: JP_TEST.38 RH_U_ResistorNetwork_forTest31.2 | length 682.4
  Top Layer w6: JP_TEST.38@236.1,620.08 306.09,620.08 343.77,582.39 343.77,351.36 424.34,270.79 RH_U_ResistorNetwork_forTest31.2@638.5,270.79
TestIn32: JP_TEST.39 RH_U_ResistorNetwork_forTest32.2 | length 718.9
  Top Layer w6: JP_TEST.39@236.1,600.39 306.09,600.39 324.09,582.39 324.09,313.05 419.82,217.32 RH_U_ResistorNetwork_forTest32.2@638.5,217.32
pads on no net: JP_DATA.0 JP_TEST.0

## Polygon pours and split planes (outlines as drawn)
GND on Bottom Layer "GND_L02_P000" (solid, remove dead copper, pour order 0): 0,3346.46 0,0 3740.16,0 3740.16,3346.46

## Keep-outs
Keep-Out Layer:
  lines w10: 0,196.85 ccw(c196.85,196.85) 196.85,0 3346.46,0 3543.31,0 ccw(c3543.31,196.85) 3740.16,196.85 3740.16,3149.61 ccw(c3543.31,3149.61) 3543.31,3346.46 3346.46,3346.46 196.85,3346.46 ccw(c196.85,3149.61) 0,3149.61 0,196.85

## Silkscreen, mask and mechanical layers (free items; w line width, h text height)
Top Overlay:
  drawing of 56 lines, arcs and shapes, not listed
  text "OUT" at 2659.61,3238.35 h60
  text "Light the Way Forward" at 539.37,3183.41 h120
  text "> FIONA Toolchain by HKUST" at 649.61,3046.88 h35
  text "*GitHub: https://github.com/hkust-fiona/" at 649.61,2977.78 h27
  text "IN" at 69.06,2864.33 h60
  text "0x00" at 2098.32,2847.21 h30
  text "0x01" at 2492.02,2847.21 h30
  text "0x02" at 2885.72,2847.21 h30
  text "0x03" at 3279.43,2847.21 h30
  text "Photonic Core" at 617.09,2757.05 h60
  text "0x04" at 2098.32,2453.51 h30
  text "0x05" at 2492.02,2453.51 h30
  text "0x06" at 2885.72,2453.51 h30
  text "0x07" at 3279.43,2453.51 h30
  text "0x08" at 2098.32,2059.81 h30
  text "0x09" at 2492.02,2059.81 h30
  text "0x0A" at 2885.72,2059.81 h30
  text "0x0B" at 3279.43,2059.81 h30
  text "0x00" at 495.96,1859.02 h30
  text "GSSSS" at 1451.88,1848.31 h36 r270
  text "FPC Connector Pinout" at 1375.14,1822.69 h38 r270
  text "0x01" at 495.96,1806.54 h30
  text "0x02" at 495.96,1753.06 h30
  text "0x03" at 495.96,1699.59 h30
  text "0x0C" at 2098.32,1666.11 h30
  text "0x0D" at 2492.02,1666.11 h30
  text "0x0E" at 2885.72,1666.11 h30
  text "0x0F" at 3279.43,1666.11 h30
  text "GND" at 165.09,1655.05 h40
  text "0x04" at 495.96,1646.12 h30
  text "GSSSS" at 1451.88,1631.78 h36 r270
  text "0x05" at 495.96,1593.63 h30
  text "0x06" at 495.96,1540.16 h30
  text "0x07" at 495.96,1486.69 h30
  text "TEST" at 19.84,1466.69 h60
  text "0x08" at 495.96,1432.22 h30
  text "GSSSS" at 1451.88,1419.18 h36 r270
  text "0x09" at 495.96,1379.74 h30
  text "0x0A" at 495.96,1326.27 h30
  text "0x0B" at 495.96,1272.79 h30
  text "0x10" at 2098.32,1272.41 h30
  text "0x11" at 2492.02,1272.41 h30
  text "0x12" at 2885.72,1272.41 h30
  text "0x13" at 3279.43,1272.41 h30
  text "0x0C" at 495.96,1218.33 h30
  text "GSSSS" at 1451.88,1206.58 h36 r270
  text "0x0D" at 495.96,1165.84 h30
  text "0x0E" at 495.96,1112.37 h30
  text "0x0F" at 495.96,1058.9 h30
  text "0x10" at 495.96,1004.43 h30
  text "SSSSG" at 1451.88,974.3 h36 r270
  text "0x11" at 495.96,951.95 h30
  text "0x12" at 495.96,898.47 h30
  text "* G: Ground" at 1381.02,887.68 h30 r270
  text "0x14" at 2098.32,878.71 h30
  text "0x15" at 2492.02,878.71 h30
  text "0x16" at 2885.72,878.71 h30
  text "0x17" at 3279.43,878.71 h30
  text "0x13" at 495.96,845 h30
  text "0x14" at 495.96,790.53 h30
  text "SSSSG" at 1451.88,761.7 h36 r270
  text "0x15" at 495.96,738.05 h30
  text "0x16" at 495.96,684.58 h30
  text "0x17" at 495.96,631.1 h30
  text "0x18" at 495.96,576.64 h30
  text "SSSSG" at 1451.88,549.1 h36 r270
  text "0x19" at 495.96,524.16 h30
  text "* S: Signal" at 1383.14,501.86 h30 r270
  text "0x18" at 2098.32,485.01 h30
  text "0x19" at 2492.02,485.01 h30
  text "0x1A" at 2885.72,485.01 h30
  text "0x1B" at 3279.43,485.01 h30
  text "0x1A" at 495.96,470.68 h30
  text "0x1B" at 495.96,417.21 h30
  text "0x1C" at 495.96,362.74 h30
  text "SSSSG" at 1451.88,332.57 h36 r270
  text "0x1D" at 495.96,310.26 h30
  text "GND" at 165.09,305.05 h40
  text "Test #01" at 911.61,295.46 h50
  text "0x1E" at 495.96,256.79 h30
  text "T1" at 1107.5,229.39 h30
  text "VERS" at 962.6,225.39 h30
  text "0x1F" at 495.96,203.31 h30
  text "32S+8G" at 1107.5,170.34 h30
  text "SPEC" at 962.6,166.34 h30
  text "ADDR OFFSET" at 489.09,125.05 h32
  text "Mar 23" at 1107.35,111.28 h30
  text "DATE" at 962.6,107.28 h30
  text "0x1C" at 2098.32,91.3 h30
  text "0x1D" at 2492.02,91.3 h30
  text "0x1E" at 2885.72,91.3 h30
  text "0x1F" at 3279.43,91.3 h30
Drill Drawing:
  text ".legend" at 4274.76,1872.51 h60